# Altium PCB LimeFEA-mPCIe_1v0.PcbDoc (part 1 of 2)
Units mm, origin at the board's own origin, x right, y up, seen from the top; angles counter-clockwise.
Board outline 100 x 70 mm, 4 copper layers (Top Layer, Mid-Layer 1, Mid-Layer 2, Bottom Layer), stack 1.48 mm thick; 102 components, 83 nets, 520 pads, 498 vias.
Unrouted connection lines stored in the file: 11.
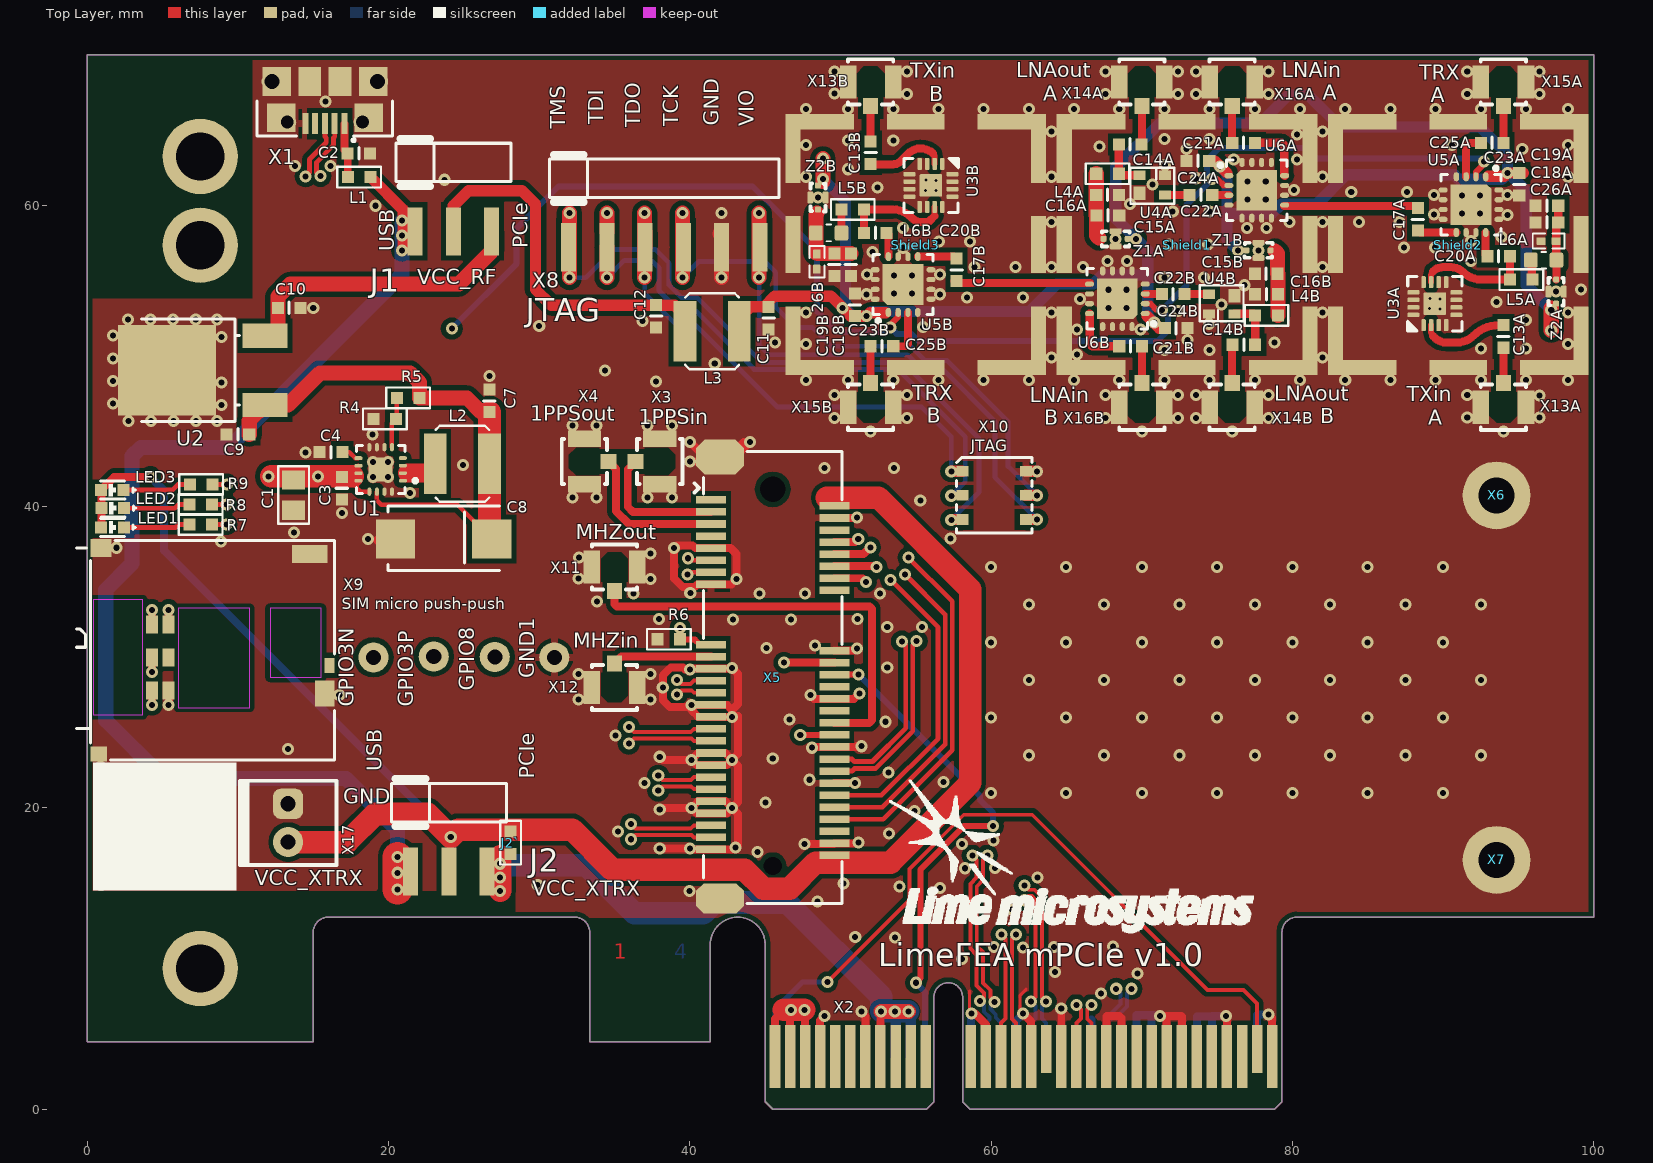
[diagram p0: Top Layer view]
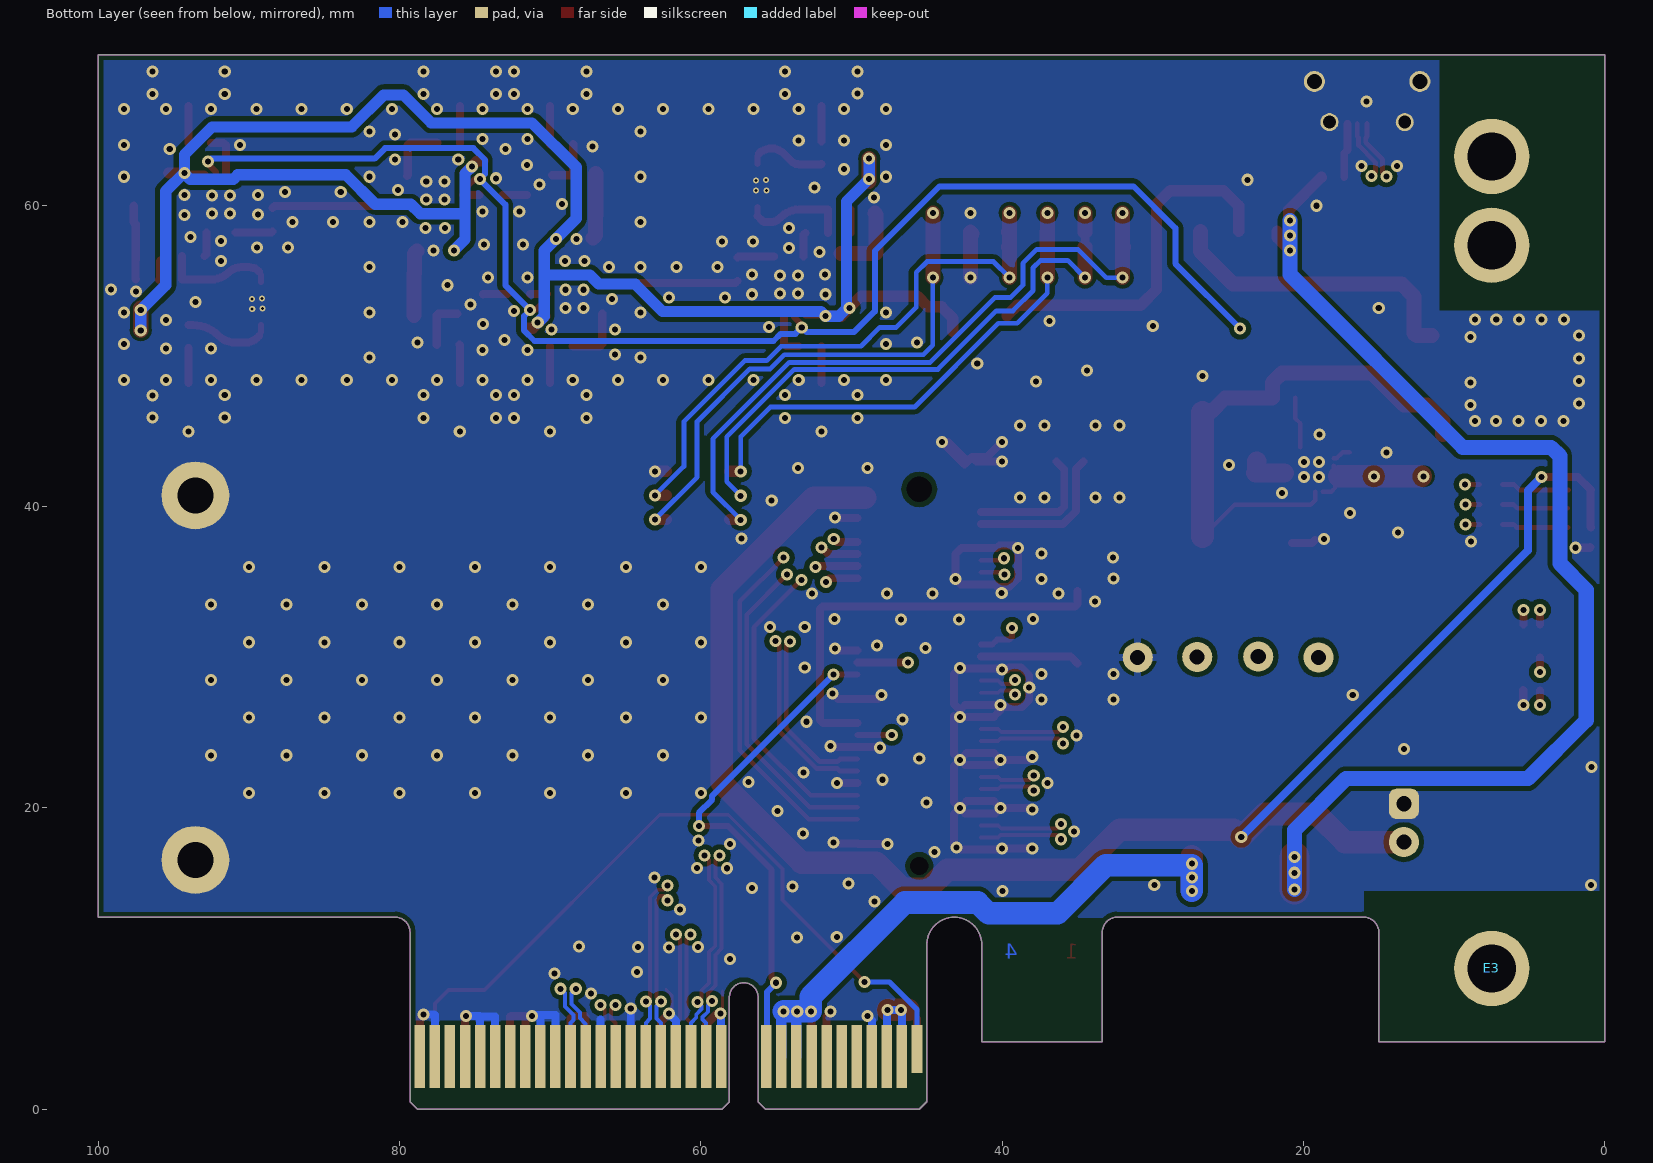
[diagram p1: Bottom Layer view, seen from below]
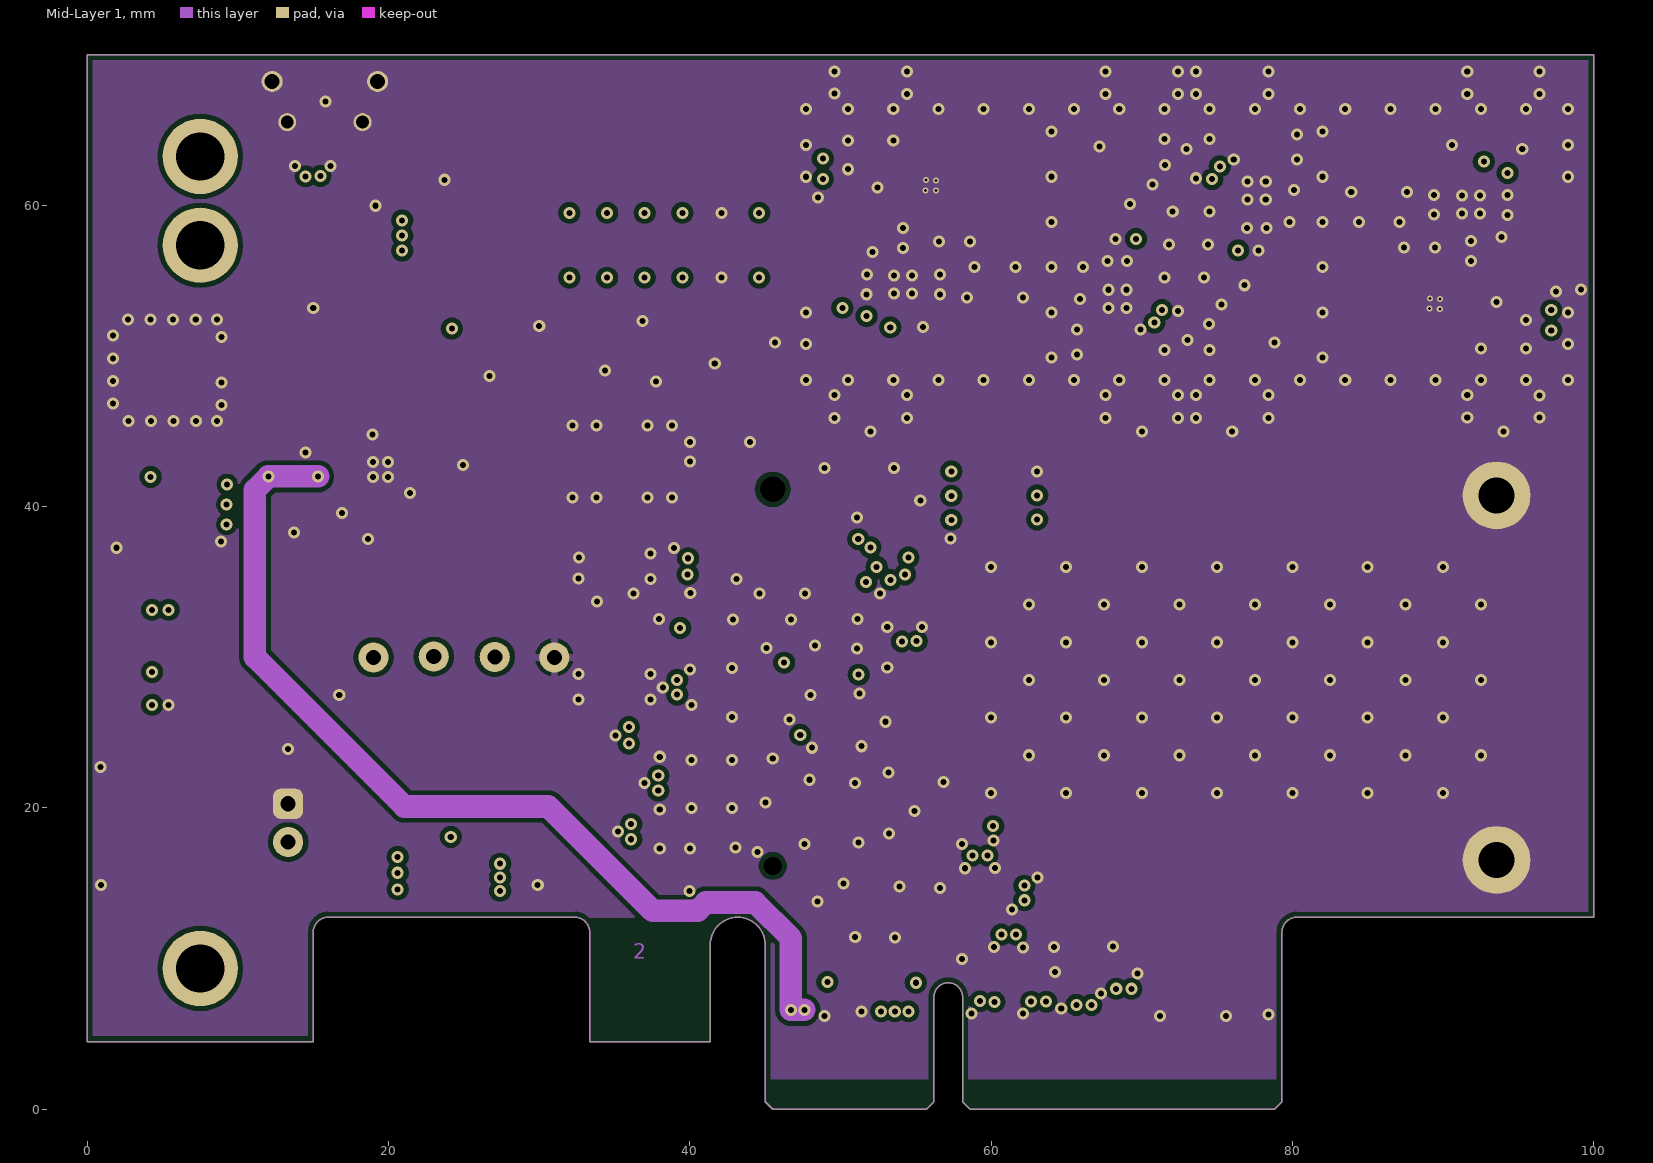
[diagram p2: Mid-Layer 1]
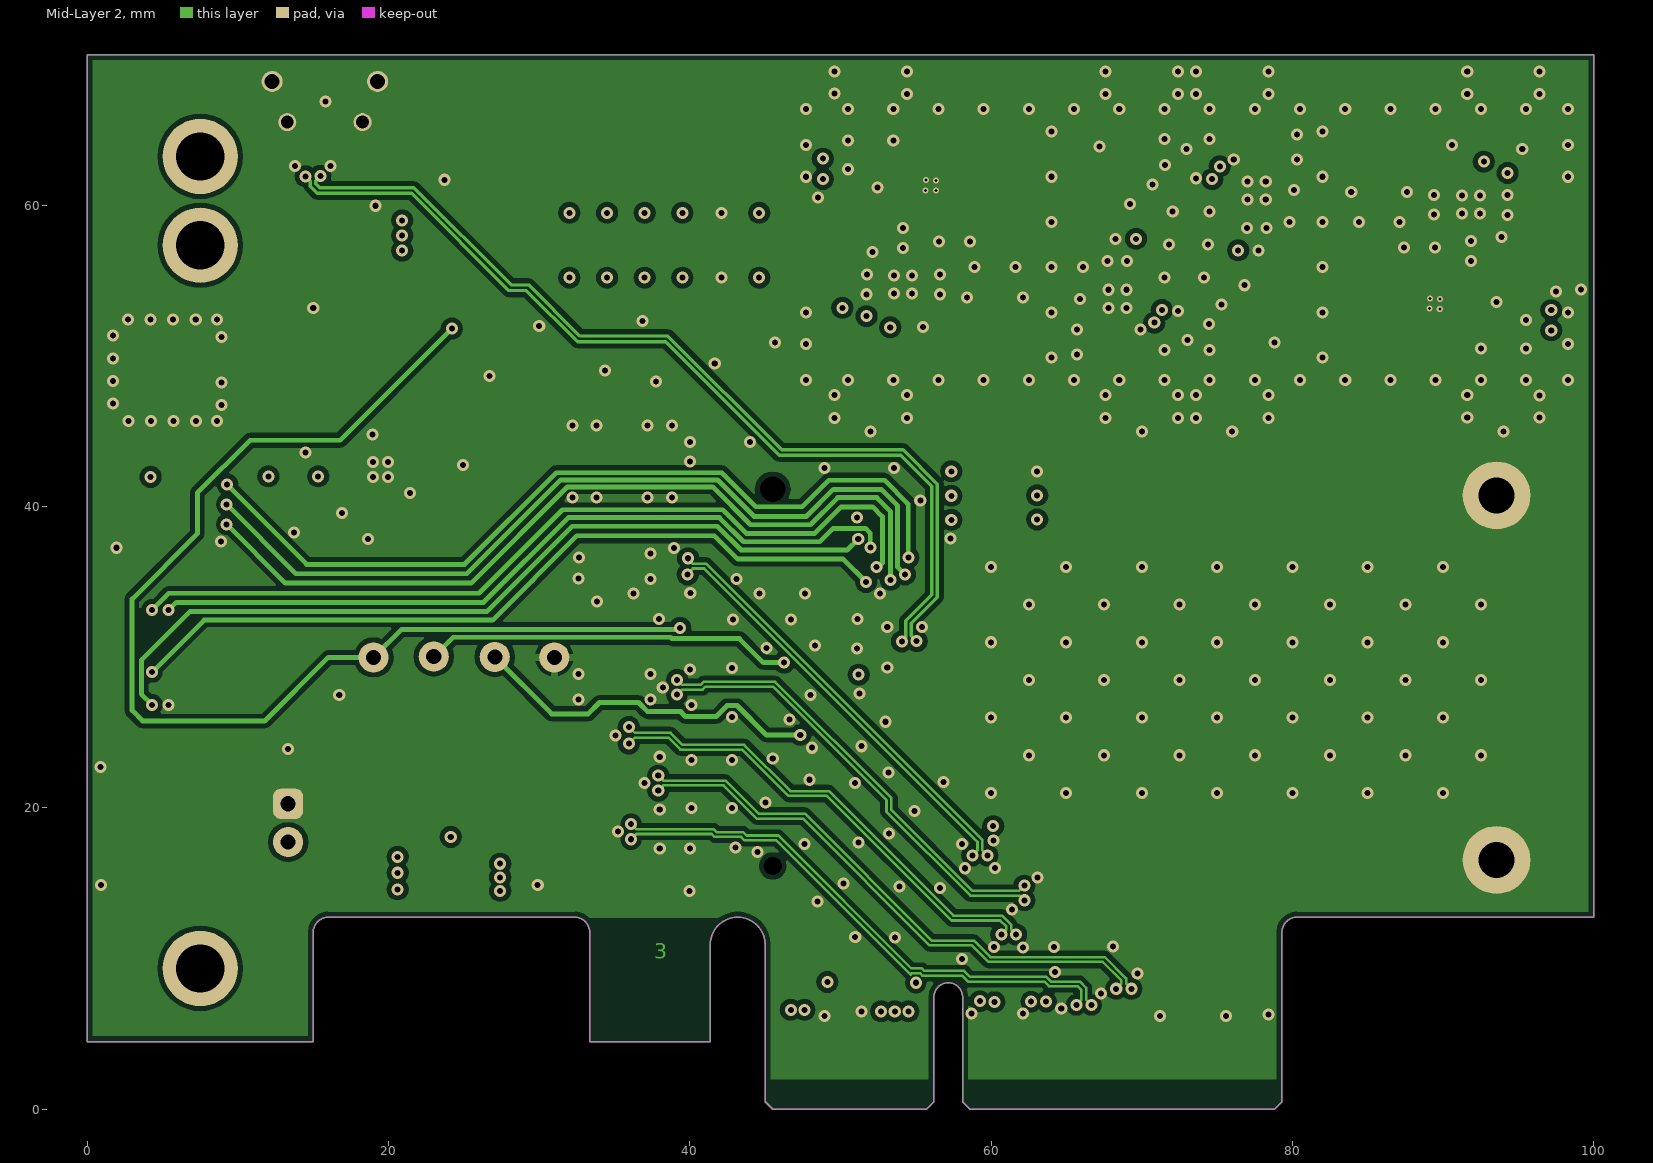
[diagram p3: Mid-Layer 2]

## Layer stack, top to bottom
Top Solder: solder mask 0.0102, Solder Resist, Dk 3.5
Top Layer: signal copper 0.035
Dielectric1: core 0.32, FR-4, Dk 4.2
Mid-Layer 1: signal copper 0.035
Dielectric2: prepreg 0.7, FR-4, Dk 4.2
Mid-Layer 2: signal copper 0.035
Dielectric3: core 0.32, FR-4, Dk 4.2
Bottom Layer: signal copper 0.035
Bottom Solder: solder mask 0.0102, Solder Resist, Dk 3.5

## Board outline
0,4.5 15,4.5 15,11.75 cw(c16,11.75) 16,12.75 32.35,12.75 cw(c32.35,11.75) 33.35,11.75 33.35,4.5 41.35,4.5 41.35,10.925 cw(c43.175,10.925) 45,10.925 45,0.5 45.5,0 55.7,0 56.2,0.5 56.2,7.45 cw(c57.15,7.45) 58.1,7.45 58.1,0.5 58.6,0 78.8,0 79.3,0.5 79.3,11.75 cw(c80.3,11.75) 80.3,12.75 100,12.75 100,70 0,70

## Design rules (kind name [scope] priority, off if disabled: settings)
Clearance Clearance_2 [All vs InPolygon] p1: gap=0.32 ignorepadtopadclearanceinfootprint=TRUE except(0: Arc-Hole Track-Hole SMDPad-Hole THPad-Hole Via-Hole Fill-Hole Poly-Hole Region-Hole Text-Hole)
Clearance Clearance_1 [All vs (OnLayer('Keep-Out Layer'))] p2: gap=0.15 ignorepadtopadclearanceinfootprint=TRUE except(0: Arc-Hole Track-Hole SMDPad-Hole THPad-Hole Via-Hole Fill-Hole Poly-Hole Region-Hole Text-Hole)
Clearance [All] p3: gap=0.15 ignorepadtopadclearanceinfootprint=TRUE
ComponentClearance [All] p1 off: gap=0.254 collisioncheckmode=3 verticalgap=0.254 showdistances=FALSE
DiffPairsRouting DiffPairsRouting_90 [InDifferentialPair('USB_D')] p1: maxlimit=0.15 minlimit=0.15 mostfreqgap=0.15 toplayer_minwidth=0.32 toplayer_maxwidth=0.32 toplayer_prefwidth=0.32 midlayer1_minwidth=0.22 midlayer1_maxwidth=0.22 midlayer1_prefwidth=0.22 midlayer2_minwidth=0.22 midlayer2_maxwidth=0.22 midlayer2_prefwidth=0.22 bottomlayer_minwidth=0.32 bottomlayer_maxwidth=0.32 bottomlayer_prefwidth=0.32 maxuncoupledlength=12.7
DiffPairsRouting DiffPairsRouting_100 [All] p2: maxlimit=0.165 minlimit=0.15 mostfreqgap=0.165 toplayer_mingap=0.165 toplayer_minwidth=0.26 toplayer_maxwidth=0.26 toplayer_prefwidth=0.26 midlayer1_maxgap=0.15 midlayer1_prefgap=0.15 midlayer1_minwidth=0.17 midlayer1_maxwidth=0.17 midlayer1_prefwidth=0.17 midlayer2_maxgap=0.15 midlayer2_prefgap=0.15 midlayer2_minwidth=0.17 midlayer2_maxwidth=0.17 midlayer2_prefwidth=0.17 bottomlayer_mingap=0.165 bottomlayer_minwidth=0.26 bottomlayer_maxwidth=0.26 bottomlayer_prefwidth=0.26 maxuncoupledlength=12.7
Height [All] p1 off: minheight=0 maxheight=25.4 prefheight=12.7
HoleSize [All] p1: absolutevalues=TRUE maxlimit=4 minlimit=0.2 maxpercent=80.000 minpercent=20.000
HoleToHoleClearance [All] p1: gap=0.4 allowstackedmicrovias=TRUE
MinimumSolderMaskSliver [All] p1: minsoldermaskwidth=0.05
NetAntennae [All] p1 off: netantennaetolerance=0
PolygonConnect PolygonConnect_2 [InNet('GND') vs HasPad('X5-0')] p1: connectstyle=Direct reliefconductorwidth=0.5 reliefentries=4 polygonreliefangle="90 Angle" airgapwidth=0.254
PolygonConnect PolygonConnect_1 [InNet('GND') vs HasFootprint('PCIe MiniCard 1.55mm conn', 'PCIE X4 EDGE CONNECTOR', 'Spring Probe Contact', 'WF-6R', 'Spring Contact 120220-0311', 'SIM-HOLDER', 'KP-C_d1mm','Molex 78864-1001') OR HasPad('X1-5','X8-2')] p2: connectstyle=Relief reliefconductorwidth=0.5 reliefentries=4 polygonreliefangle="90 Angle" airgapwidth=0.254
PolygonConnect [All] p3: connectstyle=Direct reliefconductorwidth=0.254 reliefentries=4 polygonreliefangle="90 Angle" airgapwidth=0.254
RoutingVias [All] p1: holewidth=0.4 width=0.8 viastyle="Through Hole" minholewidth=0.3 minwidth=0.7 maxholewidth=0.8 maxwidth=1
SilkToSilkClearance [All] p1: silktosilkclearance=0
SilkToSolderMaskClearance [IsPad] p1: minsilkscreentomaskgap=0 clearancetoexposedcopper=TRUE
SolderMaskExpansion [All] p1: expansion=0.102
Width [All] p1: maxlimit=2 minlimit=0.2 preferedwidth=0.53 midlayer1_prefwidth=0.33 midlayer2_prefwidth=0.33 minimp=50.000000 maximp=50.000000 favimp=50.000000
21 further rules are at their usual default settings.

## Classes and differential pairs
net class USB: USB_D_N USB_D_P
net class PCIe: NetU1_A10 NetU1_B10 PCI_REF_CLK_N PCI_REF_CLK_P PCI_RX0_N PCI_RX0_P PCI_RX1_N PCI_RX1_P PCI_TX0_N PCI_TX0_P PCI_TX1_N PCI_TX1_P
component class 04_Misc: C1 C2 C3 C4 C7 C8 C9 C10 C11 C12 C13 C15 C16 C17 E3 GND1 GPIO3N GPIO3P GPIO8 J1 J2 J2` L1 L2 L3 LED1 LED2 LED3 R4 R5 R6 R7 R7' R8 R9 Shield1 Shield2 Shield3 U1 U2 U3 X1 X2 X3 X4 X5 X6 X7 X8 X9 X10 X11 X12 X13 X15 X17 X100 X110
component class 05_RFFE: 26B C13A C13B C14A C14B C15A C15B C16A C16B C17A C17B C18A C18B C19A C19B C20A C20B C21A C21B C22A C22B C23A C23B C24A C24B C25A C25B C26A L3A L4A L4B L5A L5B L6A L6B U3A U3B U4A U4B U5A U5B U6A U6B X13A X13B X14A X14B X15A X15B X16A X16B Z1A Z1B Z2A Z2B
differential pair USB_D: +USB_D_P -USB_D_N
differential pair PCI_TX1: +PCI_TX1_P -PCI_TX1_N
differential pair PCI_TX0: +PCI_TX0_P -PCI_TX0_N
differential pair PCI_RX1: +PCI_RX1_P -PCI_RX1_N
differential pair PCI_RX0: +PCI_RX0_P -PCI_RX0_N
differential pair PCI_REF_CLK: +PCI_REF_CLK_P -PCI_REF_CLK_N

## Components (designator, comment, footprint, x,y, rotation, side; value= is the part's Value field where it differs from the comment)
26B "1uF, 10V" CAP0402 48.431,56.265 r90 top
C1 "10uF" C0805 13.7,40.776 r270 top
C2 "0.1uF" C0603-PHILLIPS 18.025,63.45 r0 top
C3 "0.1uF" C0603-PHILLIPS 16.9,41.225 r90 top
C4 "0.01uF" C0603-PHILLIPS 16.177,43.625 r180 top
C7 "22uF/6.3V" C0603-Phillips 26.7,47.025 r270 top
C8 "330uF/10V" cd7343 23.65,37.85 r0 top
C9 "0.1uF" C0603-PHILLIPS 10,44.8 r0 top
C10 "0.1uF" C0603-PHILLIPS 13.404,53.2 r180 top
C11 "10uF/6.3V" C0603-Phillips 45.222,52.513 r90 top
C12 "0.1uF" C0603-PHILLIPS 37.75,52.65 r90 top
C13A "100pF" C0603-PHILLIPS 94,51.3 r90 top
C13B "100pF" C0603-PHILLIPS 52,63.5 r270 top
C14A "100pF" C0603-PHILLIPS 69.225,64.05 r180 top
C14B "100pF" C0603-PHILLIPS 76.775,50.75 r0 top
C15A "0.1uF" C0603-PHILLIPS 67.75,59.337 r0 top
C15B "0.1uF" C0603-PHILLIPS 78.25,55.463 r180 top
C16A "100pF" C0603-PHILLIPS 67.725,60.7 r0 top
C16B "100pF" C0603-PHILLIPS 78.275,54.1 r180 top
C17A "100pF" C0603-PHILLIPS 88.325,59.075 r270 top
C17B "100pF" C0603-PHILLIPS 57.7,55.725 r90 top
C18A "0.1uF" C0603-PHILLIPS 96.889,58.877 r180 top
C18B "0.1uF" C0603-PHILLIPS 50.68,56.065 r270 top
C19A "100pF" C0603-PHILLIPS 96.889,59.977 r180 top
C19B "100pF" C0603-PHILLIPS 49.6,56.065 r270 top
C20A "100pF" C0603-PHILLIPS 93.688,56.625 r180 top
C20B "100pF" C0603-PHILLIPS 52.312,58.175 r0 top
C21A "100pF" C0603-PHILLIPS 76.75,64.15 r180 top
C21B "100pF" C0603-PHILLIPS 69.25,50.65 r0 top
C22A "100pF" C0603-PHILLIPS 73.925,60.696 r0 top
C22B "100pF" C0603-PHILLIPS 72.075,54.104 r180 top
C23A "10nF" C0603-PHILLIPS 95.05,61.4 r270 top
C23B "10nF" C0603-PHILLIPS 50.95,53.4 r90 top
C24A "10nF" C0603-PHILLIPS 73.725,62.95 r180 top
C24B "10nF" C0603-PHILLIPS 72.275,51.85 r0 top
C25A "100pF" C0603-PHILLIPS 93.25,64.15 r0 top
C25B "100pF" C0603-PHILLIPS 52.75,50.65 r180 top
C26A "1uF, 10V" CAP0402 97,57.625 r0 top
E3 "Custom PCIe Bracket XTRX" Custom_PCIe_bracket_XTRX1 7.5,9.35 r180 bottom locked value=FRW-002_PCIE_BRACKET_R5
GND1 "=Name" KP-C_d1mm#1 31,30 r0 top
GPIO3N "=Name" KP-C_d1mm#2 18.625,30 r180 top
GPIO3P "=Name" KP-C_d1mm#3 23,29.975 r180 top
GPIO8 "=Name" KP-C_d1mm#4 27,29.95 r180 top
J1 "TSM-103-01-T-SH" HEAD_MALE_3P_R/A_SMD 24.3,58.275 r0 top value="FE Power Select"
J2 "TSM-103-01-T-SH" Head_Male_3P_R/A_SMD 21.46,15.784 r0 top value="XTRX Power Select"
J2` "0" R0603-PHILLIPS 28.1,17.7 r90 top
L1 "BLM18PG181SN1D" TI160808-Phillips 18.05,61.875 r0 top
L2 "2.2uH" L-NRS5030 24.9,42.85 r90 top
L3 "15uH" L-NRS5030 41.475,51.65 r90 top
L4A "22nH" TF160808-Phillips 67.725,62.1 r0 top
L4B "22nH" TF160808-Phillips 78.275,52.7 r180 top
L5A "22nH" TF160808-Phillips 95.188,55.075 r180 top
L5B "22nH" TF160808-Phillips 50.812,59.725 r0 top
L6A "220nH, 2%" RES0603 96.672,56.363 r180 top
L6B "220nH, 2%" RES0603 49.212,58.175 r0 top
LED1 "LTST-C190KGKT" LED-0603GR 1.675,38.625 r180 top value=GREEN
LED2 "LTST-C190KGKT" LED-0603GR 1.7,39.9 r180 top value=GREEN
LED3 "LTST-C190KRKT" LED-0603RD 1.662,41.1 r180 top value=RED
R4 "2k" R0603-PHILLIPS 19.75,45.825 r180 top
R5 "12k" R0603-PHILLIPS 21.296,47.225 r0 top
R6 "1k" R0603-PHILLIPS 38.6,31.2 r0 top
R7 "330" R0603-PHILLIPS 7.525,38.824 r180 top
R8 "330" R0603-PHILLIPS 7.525,40.139 r180 top
R9 "330" R0603-PHILLIPS 7.555,41.475 r180 top
Shield1 "Screening shield frame BMI-S-202-F" BMI-S-202-F 64.35,48.75 r0 top locked
Shield2 "Screening shield frame BMI-S-202-F" BMI-S-202-F 82.35,48.75 r0 top locked
Shield3 "Screening shield frame BMI-S-202-F" BMI-S-202-F 46.35,48.75 r0 top locked
U1 "TPS62130RG" QFN16(3x3/0/5mm)-Case485AE 19.475,42.475 r180 top
U2 "NCP5501DT50G" DPAK-3 11.8,49.05 r90 top
U3A "TQP3M9018" TQP3M9018_PA_QFN16 89.45,53.475 r90 top
U3B "TQP3M9018" TQP3M9018_PA_QFN16 56,61.325 r270 top
U4A "SPF-5043Z" SOT-343[2X1.25] 70.7,61.35 r270 top
U4B "SPF-5043Z" SOT-343[2X1.25] 75.3,53.45 r90 top
U5A "SKY13286-359LF" "QFN16(4x4/0.65mm) SQ" 91.85,60.05 r270 top
U5B "SKY13286-359LF" "QFN16(4x4/0.65mm) SQ" 54.15,54.75 r90 top
U6A "SKY13286-359LF" "QFN16(4x4/0.65mm) SQ" 77.625,61 r0 top
U6B "SKY13286-359LF" "QFN16(4x4/0.65mm) SQ" 68.375,53.8 r180 top
X1 "105017-0001" USB-micro-B 15.775,69.675 r180 top
X2 "Mini PCI Express Card Edge connector" "PCIE X4 EDGE CONNECTOR" 45,0 r0 top locked
X3 "0734120110" U_FL 38,43 r0 top
X4 "0734120110" U_FL 33,43 r180 top
X5 "PCIe MiniCard 1.55mm connector" "PCIE MINICARD 1.55MM CONN" 45.5,41.15 r270 top locked
X6 "NT1R3000" "PCIe MiniCard 1.55mm stand off nut" 93.55,40.75 r0 top locked
X7 "NT1R3000" "PCIe MiniCard 1.55mm stand off nut" 93.55,16.55 r0 top locked
X8 "TSM-106-01-T-SH" HEAD_MALE_6P_R/A_SMD 38.3,57.225 r0 top value=JTAG
X9 "SIM micro push-push" SIM_SF56S006V4BR2000-dig 8.3,30.47 r0 top locked value=SF56S006V4BR2000
X10 "JTAG" "Molex 78864-1001" 60.2,40.75 r90 top locked
X11 "0734120110" U_FL 35,36 r90 top
X12 "0734120110" U_FL 35,28 r270 top
X13A "0734120110" U_FL 94,46.6 r270 top
X13B "0734120110" U_FL 52,68.2 r90 top
X14A "0734120110" U_FL 70,68.2 r90 top
X14B "0734120110" U_FL 76,46.6 r270 top
X15A "0734120110" U_FL 94,68.2 r90 top
X15B "0734120110" U_FL 52,46.6 r270 top
X16A "0734120110" U_FL 76,68.2 r90 top
X16B "0734120110" U_FL 70,46.6 r270 top
X17 "Header 2X1" Header1x2_TH_LOCKING 13.335,19.008 r90 top
Z1A "KNH16C105DB5TS" "KNH16 - DB Serie" 68.263,57.781 r180 top value=1uF/10V/2A
Z1B "KNH16C105DB5TS" "KNH16 - DB Serie" 77.737,57.019 r0 top value=1uF/10V/2A
Z2A "KNH16C105DB5TS" "KNH16 - DB Serie" 97.5,54.275 r90 top value=1uF/10V/2A
Z2B "KNH16C105DB5TS" "KNH16 - DB Serie" 48.5,60.525 r270 top value=1uF/10V/2A

## Footprints (in the part's own frame and the unit in brackets; to place one, negate y for a bottom-side part, rotate by r counter-clockwise, add the part's x,y. Pads: shape width x height; smd on the part's side, far side on the other; paste and mask are expansions set on the pad)
BMI-S-202-F [mm] "Screening Shield Frame 16.5x16.5x3.6mm"
  rect 1x4.55 smd paste-2: 0(0.5,2.275) 0(0.5,15.025) 0(16.8,2.275) 0(16.8,15.025)
  rect 1x3.8 smd: 0(0.5,8.65) 0(16.8,8.65)
  rect 4.55x1 smd: 0(2.275,0.5) 0(2.275,16.8) 0(15.025,0.5) 0(15.025,16.8)
  rect 3.8x1 smd: 0(8.65,0.5) 0(8.65,16.8)
  body extent 0.4,0.4 16.9,16.9, height 3.6
C0603-PHILLIPS [mm]
  rect 0.8x0.8 smd: 1(-0.75,0) 2(0.75,0)
  silkscreen extent 0,-0.38 0,0.38, body extent -0.8,-0.4 0.8,0.4, height 0.3
C0603-Phillips [mm]
  rect 0.8x0.8 smd: 1(-0.75,0) 2(0.75,0)
  silkscreen extent 0,-0.38 0,0.38, body extent -0.8,-0.4 0.8,0.4, height 0.3
C0805 [mil]
  rect 50x60 smd: 1(-39.37,0) 2(40,0)
  silkscreen extent -75,-40 75,40, body extent -39,-24 40,25, height 31
CAP0402 [mm] "Chip Capacitor, Body 1.0x0.5mm, 0402, IPC Medium Density"
  round 0.2 on Mech15: 0(0,0)
  rrect20% 0.6x0.5 smd: 1(-0.5,0) 2(0.5,0)
  Top Layer pour cut-out: -0.2,0.35 0.2,0.35 0.2,-0.35 -0.2,-0.35
  silkscreen extent -1.05,-0.5 1.05,0.5, body extent -0.52,-0.27 0.53,0.28, height 0.55
cd7343 [mm]
  rect 2.6x2.6 smd: 1(3.2,0) 2(-3.2,0)
  silkscreen extent -3.7,-2.1 3.7,2.2, body extent -3.51,-2.04 3.5,2.03, height 3.1
Custom_PCIe_bracket_XTRX1 [mil] "3D STEP model of XTRX Custom-made PCIe bracket v1"
  round 60 smd paste-78.74: 0(0,0)
  body extent -125,-964 820,3794, height 175
DPAK-3 [mm] "TO-252"
  rect 1.6x3 smd: 1(-2.3,0) 3(2.3,0)
  rect 6x6.5 smd: 2(0,6.5)
  silkscreen extent -3.4,1.7 3.4,8.2, body extent -3.3,-0.9 3.3,9.2, height 2.4
HEAD_MALE_3P_R/A_SMD [mm] "Samtec Header Male 3p 2.54mm Right Angle SMD"
  rect 1x3.2 smd: 1(-2.54,0) 2(0,0) 3(2.54,0)
  silkscreen extent -3.82,3 3.84,6.15, body extent -3.81,-1.5 3.81,11.69, height 3.05
Head_Male_3P_R/A_SMD [mm] "Samtec Header Male 3p 2.54mm Right Angle SMD"
  rect 1x3.2 smd: 1(0,0) 2(2.54,0) 3(5.08,0)
  silkscreen extent -1.28,3 6.38,6.15, body extent -1.27,-1.5 6.35,11.69, height 3.05
HEAD_MALE_6P_R/A_SMD [mm] "Samtec Header Male 6p 2.54mm Right Angle SMD"
  rect 1x3.2 smd: 1(-6.35,0) 2(-3.81,0) 3(-1.27,0) 4(1.27,0) 5(3.81,0) 6(6.35,0)
  silkscreen extent -7.63,3 7.63,6.15, body extent -7.62,-1.5 7.62,11.69, height 3.05
Header1x2_TH_LOCKING [mm]
  rrect50% 2x2 hole 1: 1(1.271,0)
  round 2 hole 1: 2(-1.271,0)
  silkscreen extent -2.8,-3.2 2.8,3.2, body extent -2.54,-2.9 2.54,2.9, height 11.52
"KNH16 - DB Serie" [mm] "EMI Filter"
  rrect50% 0.4x0.4 smd mask+0.05: 1(-0.8,0) 3(0.8,0)
  rrect50% 0.8x0.4 smd mask+0.05: 2(0,0.5) 2(0,-0.5)
  silkscreen extent -0.92,-0.5 0.92,0.5, body extent -0.79,-0.4 0.79,0.4, height 0.6
KP-C_d1mm#1 [mm]
  round 2 hole 1: 1(0,0)
KP-C_d1mm#2 [mm]
  round 2 hole 1: 1(-0.375,0)
KP-C_d1mm#3 [mm]
  round 2 hole 1: 1(0,-0.075)
KP-C_d1mm#4 [mm]
  round 2 hole 1: 1(-0.05,-0.075)
L-NRS5030 [mm] "Inductor Taiyo Yuden 5x5mm"
  rect 4x1.5 smd: 1(0,1.8) 2(0,-1.8)
  silkscreen extent -2.52,-1.79 2.52,1.79, body extent -2.45,-2.45 2.45,2.45, height 3
LED-0603GR [mm] "LED GREEN 0603"
  rect 0.8x0.8 smd: 1(-0.75,0) 2(0.75,0)
  silkscreen extent -1.53,-0.6 0.8,0.6, body extent -1.09,-0.4 0.92,0.4, height 0.8
LED-0603RD [mm] "LED RED 0603"
  rect 0.8x0.8 smd: 1(-0.75,0) 2(0.75,0)
  silkscreen extent -1.53,-0.6 0.8,0.6, body extent -1.09,-0.4 0.92,0.4, height 0.8
"Molex 78864-1001" [mm] "Spring connector, gap=1.2~1.6mm, pitch=1.6mm, 6pos"
  rect 0.7x0.8 smd: 1(1.6,2.1) 2(0,2.1) 3(-1.6,2.1) 4(-1.6,-2.1) 5(0,-2.1) 6(1.6,-2.1)
  silkscreen extent -2.5,-2.5 2.5,2.5, body extent -2.4,-2.5 2.4,2.5, height 2
"PCIE MINICARD 1.55MM CONN" [mm] "PCIe MiniCard connector full size with mounting nuts"
  oct 2.3x3.2 smd: 0(-2.15,-3.5)
  oct 2x3.2 smd: 0(27.15,-3.5)
  rect 0.5x2 smd mask+0.05: 1(0.7,-4.1) 2(1.1,4.1) 3(1.5,-4.1) 4(1.9,4.1) 5(2.3,-4.1) 6(2.7,4.1) 7(3.1,-4.1) 8(3.5,4.1) 9(3.9,-4.1) 10(4.3,4.1) 11(4.7,-4.1) 12(5.1,4.1) 13(5.5,-4.1) 14(5.9,4.1) 15(6.3,-4.1) 16(6.7,4.1) 17(10.3,-4.1) 18(10.7,4.1) 19(11.1,-4.1) 20(11.5,4.1) 21(11.9,-4.1) 22(12.3,4.1) 23(12.7,-4.1) 24(13.1,4.1) 25(13.5,-4.1) 26(13.9,4.1) 27(14.3,-4.1) 28(14.7,4.1) 29(15.1,-4.1) 30(15.5,4.1) 31(15.9,-4.1) 32(16.3,4.1) 33(16.7,-4.1) 34(17.1,4.1) 35(17.5,-4.1) 36(17.9,4.1) 37(18.3,-4.1) 38(18.7,4.1) 39(19.1,-4.1) 40(19.5,4.1) 41(19.9,-4.1) 42(20.3,4.1) 43(20.7,-4.1) 44(21.1,4.1) 45(21.5,-4.1) 46(21.9,4.1) 47(22.3,-4.1) 48(22.7,4.1) 49(23.1,-4.1) 50(23.5,4.1) 51(23.9,-4.1) 52(24.3,4.1)
  round 0 hole 1.7 unplated: MH0(0,0)
  round 0 hole 1.2 unplated: MH0(25,0)
  silkscreen extent -2.5,-5.2 27.5,4.6, body extent -2.45,-4.55 27.45,4.54, height 4
"PCIe MiniCard 1.55mm stand off nut" [mm] "PCIe MiniCard connector mounting stand off nut"
  round 4.5 hole 2.4: 0(0,0)
  body extent -2,-2 2,2, height 1.55
"PCIE X4 EDGE CONNECTOR" [mm] "Golden finger, PCIe x4, Dual, Staggered, Pitch 1mm, 2x32-Position"
  rect 0.7x3.2 smd far side paste-5: A1(0.65,4)
  rect 0.7x4.2 smd far side paste-5: A2(1.65,3.5) A3(2.65,3.5) A4(3.65,3.5) A5(4.65,3.5) A6(5.65,3.5) A7(6.65,3.5) A8(7.65,3.5) A9(8.65,3.5) A10(9.65,3.5) A11(10.65,3.5) A12(13.65,3.5) A13(14.65,3.5) A14(15.65,3.5) A15(16.65,3.5) A16(17.65,3.5) A17(18.65,3.5) A18(19.65,3.5) A19(20.65,3.5) A20(21.65,3.5) A21(22.65,3.5) A22(23.65,3.5) A23(24.65,3.5) A24(25.65,3.5) A25(26.65,3.5) A26(27.65,3.5) A27(28.65,3.5) A28(29.65,3.5) A29(30.65,3.5) A30(31.65,3.5) A31(32.65,3.5) A32(33.65,3.5)
  rect 0.7x4.2 smd paste-5: B1(0.65,3.5) B2(1.65,3.5) B3(2.65,3.5) B4(3.65,3.5) B5(4.65,3.5) B6(5.65,3.5) B7(6.65,3.5) B8(7.65,3.5) B9(8.65,3.5) B10(9.65,3.5) B11(10.65,3.5) B12(13.65,3.5) B13(14.65,3.5) B14(15.65,3.5) B15(16.65,3.5) B16(17.65,3.5) B18(19.65,3.5) B19(20.65,3.5) B20(21.65,3.5) B21(22.65,3.5) B22(23.65,3.5) B23(24.65,3.5) B24(25.65,3.5) B25(26.65,3.5) B26(27.65,3.5) B27(28.65,3.5) B28(29.65,3.5) B29(30.65,3.5) B30(31.65,3.5) B32(33.65,3.5)
  rect 0.7x3.2 smd paste-5: B17(18.65,4) B31(32.65,4)
  round 5 hole 3.2 paste-5: MH1(-37.5,9.35) MH48(-37.5,57.35) MH53(-37.5,63.25)
QFN16(3x3/0/5mm)-Case485AE [mm] "NLAS3899"
  rect 1.6x1.6 smd paste-1: 0(0,0)
  oval 0.55x0.25 smd mask+0.075: 1(-1.475,0.75) 2(-1.475,0.25) 3(-1.475,-0.25) 4(-1.475,-0.75) 9(1.475,-0.75) 10(1.475,-0.25) 11(1.475,0.25) 12(1.475,0.75)
  oval 0.25x0.55 smd mask+0.075: 5(-0.75,-1.475) 6(-0.25,-1.475) 7(0.25,-1.475) 8(0.75,-1.475) 13(0.75,1.475) 14(0.25,1.475) 15(-0.25,1.475) 16(-0.75,1.475)
  silkscreen extent -2.43,-1.6 1.6,1.6, body extent -1.5,-1.5 1.5,1.5, height 1
"QFN16(4x4/0.65mm) SQ" [mm] "QFN, 16-Leads, Body 4,0x4,0mm (SQ), Pitch 0,65mm, IPC High Density"
  oct 1.15x1.15 smd paste+0 mask+0: 0(-0.775,0.775)
  rect 2.7x2 smd paste+0 mask+0: 0(0,-0.35)
  rect 2x2.7 smd paste+0 mask+0: 0(0.35,0)
  oval 0.6x0.35 smd: 1(-1.85,0.975) 2(-1.85,0.325) 3(-1.85,-0.325) 4(-1.85,-0.975) 9(1.85,-0.975) 10(1.85,-0.325) 11(1.85,0.325) 12(1.85,0.975)
  oval 0.35x0.6 smd: 5(-0.975,-1.85) 6(-0.325,-1.85) 7(0.325,-1.85) 8(0.975,-1.85) 13(0.975,1.85) 14(0.325,1.85) 15(-0.325,1.85) 16(-0.975,1.85)
  silkscreen extent -2.54,-2 2,2, body extent -2,-2 2,2, height 0.86
R0603-PHILLIPS [mm]
  rect 0.8x0.8 smd: 1(-0.75,0) 2(0.75,0)
  silkscreen extent -1.45,-0.69 1.45,0.69, body extent -0.8,-0.4 0.8,0.4, height 0.3
RES0603 [mm] "Chip Resistor, Body 1.6x0.8mm, 0603, IPC Medium Density"
  round 0.254 on Mech15: 0(0,0)
  rrect25% 0.9x1 smd: 1(-0.85,0) 2(0.85,0)
  Top Layer pour cut-out: -0.4,0.6 0.4,0.6 0.4,-0.6 -0.4,-0.6
  silkscreen extent -0.15,-0.56 0.15,0.56, body extent -0.87,-0.47 0.88,0.48, height 0.54
SIM_SF56S006V4BR2000-dig [mm] "JAE push-push, micro SIM card holder"
  rect 1.1x1 smd: 0(-7.55,-6.9)
  rect 1.4x1.2 smd: 0(-7.4,6.8)
  rect 2.35x1.2 smd: 0(6.475,6.4)
  rect 1.3x1.75 smd: 0(7.45,-2.87)
  rect 0.8x1.2 smd: 1(-4,-2.66) 2(-4,-0.47) 3(-4,1.72) 5(-2.9,-2.66) 6(-2.9,-0.47) 7(-2.9,1.72)
  rect 0.65x1 smd: 8(7.775,-1)
  Top Layer keep-out region: -7.9,-4.275 -4.625,-4.275 -4.625,3.35 -7.9,3.35
  Top Layer keep-out region: -2.275,-3.8 2.475,-3.8 2.475,2.8 -2.275,2.8
  Top Layer keep-out region: 3.85,-1.8 7.225,-1.8 7.225,2.8 3.85,2.8
  silkscreen extent -9,-7.3 8.1,7.3, body extent -9.1,-7.2 8,7.2, height 1.22
SOT-343[2X1.25] [mm]
  rect 0.6x0.8 smd: 1(-0.65,-0.85) 3(0.65,0.85) 4(-0.65,0.85)
  rect 0.9x0.8 smd: 2(0.55,-0.85)
  silkscreen extent -1.15,-1.45 1.25,1.45, body extent -1,-1.08 1,1.02, height 0.9
TF160808-Phillips [mm]
  rect 0.8x0.8 smd: 1(-0.75,0) 2(0.75,0)
  silkscreen extent -1.45,-0.69 1.45,0.69, body extent -0.86,-0.45 0.85,0.45, height 0.9
TI160808-Phillips [mm]
  rect 0.8x0.8 smd: 1(-0.75,0) 2(0.75,0)
  silkscreen extent -1.45,-0.69 1.45,0.69, body extent -0.86,-0.45 0.85,0.45, height 0.9
TQP3M9018_PA_QFN16 [mm]
  rrect50% 0.8x0.3 smd mask+0.05: 1(-1.425,0.75) 2(-1.425,0.25) 3(-1.425,-0.25) 4(-1.425,-0.75) 9(1.425,-0.75) 10(1.425,-0.25) 11(1.425,0.25) 12(1.425,0.75)
  rrect50% 0.3x0.8 smd mask+0.05: 5(-0.75,-1.425) 6(-0.25,-1.425) 7(0.25,-1.425) 8(0.75,-1.425) 13(0.75,1.425) 14(0.25,1.425) 15(-0.25,1.425) 16(-0.75,1.425)
  rrect10% 1.5x1.5 smd mask+0.05: PAD(0,0)
  silkscreen extent -1.8,-1.8 1.8,1.83, body extent -1.5,-1.5 1.5,1.5, height 0.92
U_FL [mm] "Ultraminiature Coax Connector (UMCC)"
  rect 1.05x1 smd: 1(-1.6,0)
  rect 2.2x1.1 smd: 2(0,-1.5) 2(0,1.5)
  Top Layer pour cut-out: -1,0.925 0.55,0.925 1.025,0.45 1.025,-0.45 0.55,-0.925 -1,-0.925
  silkscreen extent -1.5,-1.5 1.5,1.5, body extent -1.55,-1.5 1.3,1.5, height 1.25
USB-micro-B [mm] "Molex 105017-0001"
  round 1.4 hole 1: 0(-3.5,1.45) 0(3.5,1.45)
  rect 1.9x1.9 smd: 0(-3.2,1.45) 0(-2.9,3.85) 0(2.9,3.85) 0(3.2,1.45)
  round 1.2 hole 0.85: 0(-2.5,4.15) 0(2.5,4.15)
  rect 1.5x1.9 smd: 0(-1,1.45) 0(1,1.45)
  rect 0.4x1.4 smd mask+0.074: 1(-1.3,4.25) 2(-0.65,4.25) 3(0,4.25) 4(0.65,4.25) 5(1.3,4.25)
  silkscreen extent -4.5,2.75 4.5,5.45, body extent -4.1,-1.13 4.1,4.3, height 2.7

## Part data
26B C26A: library part Cap_0402, "CAP CER 1UF 10V X5R 0402", Manufacturer=Yageo, Manufacturer Part Number 1=CC0402MRX5R6BB105, Operating Temperature="-55°C ~ 85°C", Package / Case="0402 (1005 Metric)", Ratings=-, Supplier Part Number 1=311-1732-1-ND, Temperature Coefficient=X5R, Tolerance=±20%, Voltage - Rated=10V, Applications="General Purpose", Category=Capacitors, ComponentLink1Description=http://www.yageo.com/documents/recent/UPY-GPHC_X5R_4V-to-50V_25.pdf, ComponentLink1URL=http://www.yageo.com/documents/recent/UPY-GPHC_X5R_4V-to-50V_25.pdf, Failure Rate=-, Features=-, Height - Seated (Max)=-, Lead Spacing=-, Lead Style=-, Mounting Type="Surface Mount, MLCC", Notification="Current market demand for these product types have resulted in fluctuating and extending lead times. Lead times may differ.", Packaging="Cut Tape (CT)", Part Description="1µF 10V Ceramic Capacitor X5R 0402 (1005 Metric) 0.039\" L x 0.020\" W (1.00mm x 0.50mm)", Part Status=Active, Pricing 1="1=0.22, 10=0.156, 100=0.0732, 500=0.0513, 1000=0.04248, 2500=0.03953, 5000=0.03617 (USD)", RoHS="RoHS Compliant", Size / Dimension="0.039\" L x 0.020\" W (1.00mm x 0.50mm)", Stock 1=69600, Supplier 1=Digi-Key, Thickness (Max)="0.022\" (0.55mm)"
C1: library part C0805, "Capacitor", Manufacturer=MURATA, Tolerance=20%, Link=https://octopart.com/search?start=0&sort=avg_price&sort-dir=asc&category_ids=6332&specs.capacitance.value=1e-05&specs.voltage_rating_dc.value=25&avg_avail=(1__*)&specs.case_package_si.value=2012, Name=SMD0805, U/P/TKE=X5R/16V
C2 C3 C4 C7 C9 C10 C11 C12 C13A C13B C14A C14B C15A C15B C16A C16B C17A C17B C18A C18B C19A C19B C20A C20B C21A C21B C22A C22B C23A C23B C24A C24B C25A C25B: library part C0603, "Capacitor", Manufacturer=MURATA, Tolerance=20%, Name=SMD0603
  C2 C3 C4 C9 C10 C12 C15A C15B C18A C18B C23A C23B C24A C24B: U/P/TKE=X7R
  C7: Link=https://octopart.com/grm188r60j226mea0d-murata-21407286, U/P/TKE=X5R/6.3V
  C11: Link=https://octopart.com/search?q=0603+10uF+6.3v, U/P/TKE=Y5V
  C13A C13B C14A C14B C16A C16B C17A C17B C19A C19B C20A C20B C21A C21B C22A C22B C25A C25B: U/P/TKE=NP0
C8: library part CD7343, "Capacitor", Manufacturer=Kemet, Link=https://octopart.com/search?q=330uF+10V+tantalum+D, Name=CASE-D, U/P/TKE=10V
E3: library part PCI_Bracket_XTRX1, "CNC'ed enclosure component", Link=https://drive.google.com/drive/u/0/folders/1H4kDKzo1hdiNwqkA16l54XGZ7OmraAuD, Name="Custom PCIe Bracket XTRX"
GND1 GPIO3N GPIO3P GPIO8: library part KP40X40, Manufacturer=PCB
J1 J2: library part "JUMPER_3P R/A SMD", "Jumper 3 pin", Manufacturer=Samtec, Link=https://octopart.com/tsm-103-01-t-sh-samtec-8024795?r=sp&s=QwI2rG3eQKmfzGqx_DrZCQ, Misc="SMT 3pin R/A jumper/connector", Name=TSM-103-01-T-SH
J2`: library part R0603, "Jumper", Manufacturer=YAGEO, Tolerance=1%, Name=SMD0603, U/P/TKE=0.1W
L1: library part EMI_BLM18, "Ferrite Bead EMIFIL", Manufacturer=MURATA, Link=https://octopart.com/blm18pg181sn1d-murata-755298?r=sp&s=UoqSqWT2SxaJq0Sn2mx1DQ, Name=BLM18PG181SN1D, U/P/TKE="180 Ohm, 90 mOhm,1.5A"
L2 L3: library part L-NRS50x0, "Coil", Manufacturer="Taiyo Yuden", Tolerance=20%, Link=https://octopart.com/nrs5020t150mmgj-taiyo+yuden-13146350
  L2: Name=NRS5020T2R2NMGJ, U/P/TKE=2.9A/42mOhm
  L3: Name=NRS5020T150MMGJ, U/P/TKE=1.1A/165mOhm
L4A L4B L5A L5B: library part TF160808, "Coil", Manufacturer=MuRata, Link=https://octopart.com/lqw18an22ng00d-murata-890271, Misc="Self Resonance >4GHz", Name=LQW18AN22NG00D
L6A L6B: library part Inductor, "Power Inductors - SMD .22 UH 20%", Manufacturer=TDK, Manufacturer Part Number 1=MLZ1608DR22DT000, Supplier Part Number 1=445-6387-1-ND, ComponentLink1Description=http://productfinder.pulseeng.com/products/datasheets/WC701.pdf, ComponentLink1URL=http://productfinder.pulseeng.com/products/datasheets/WC701.pdf, ComponentLink2Description=https://datasheet.ciiva.com/11799/0900766b80a002db-11799279.pdf?src-supplier=RSComponents, ComponentLink2URL=https://datasheet.ciiva.com/11799/0900766b80a002db-11799279.pdf?src-supplier=RSComponents, ComponentLink3Description=https://datasheet.ciiva.com/14124/qhlqw18a-data-e-14124619.pdf?src-supplier=Distrelec, ComponentLink3URL=https://datasheet.ciiva.com/14124/qhlqw18a-data-e-14124619.pdf?src-supplier=Distrelec, ComponentLink4Description=https://datasheet.ciiva.com/6705/l0075s0080lqw18a-00-6705627.pdf?src-supplier=Digi-Key, ComponentLink4URL=https://datasheet.ciiva.com/6705/l0075s0080lqw18a-00-6705627.pdf?src-supplier=Digi-Key, ComponentLink5Description=https://datasheet.ciiva.com/6705/l0075s0080lqw18a-00-6705626.pdf?src-supplier=Digi-Key, ComponentLink5URL=https://datasheet.ciiva.com/6705/l0075s0080lqw18a-00-6705626.pdf?src-supplier=Digi-Key, ComponentLink6Description=https://datasheet.ciiva.com/6705/l0075s0080lqw18a-00-6705631.pdf?src-supplier=Digi-Key, ComponentLink6URL=https://datasheet.ciiva.com/6705/l0075s0080lqw18a-00-6705631.pdf?src-supplier=Digi-Key, ComponentLink7Description=https://datasheet.ciiva.com/4977/product-4977173.pdf?src-supplier=Mouser, ComponentLink7URL=https://datasheet.ciiva.com/4977/product-4977173.pdf?src-supplier=Mouser, ComponentLink8Description=https://datasheet.ciiva.com/46391/1487239-46391853.pdf?src-supplier=Element14, ComponentLink8URL=https://datasheet.ciiva.com/46391/1487239-46391853.pdf?src-supplier=Element14, ComponentLink9Description=https://datasheet.ciiva.com/8507/l0075s0080lqw18a-00-8507496.pdf?src-supplier=Avnet, ComponentLink9URL=https://datasheet.ciiva.com/8507/l0075s0080lqw18a-00-8507496.pdf?src-supplier=Avnet, ComponentLink10Description=https://datasheet.ciiva.com/29698/inductor-commercial-decoupling-mlz-en-29698909.pdf?src-supplier=Digikey, ComponentLink10URL=https://datasheet.ciiva.com/29698/inductor-commercial-decoupling-mlz-en-29698909.pdf?src-supplier=Digikey, ComponentLink11Description=https://datasheet.ciiva.com/29698/inductor-commercial-decoupling-mlz-en-29698910.pdf?src-supplier=Digikey, ComponentLink11URL=https://datasheet.ciiva.com/29698/inductor-commercial-decoupling-mlz-en-29698910.pdf?src-supplier=Digikey, ComponentLink12Description=https://datasheet.ciiva.com/29698/inductor-commercial-decoupling-mlz-en-29698911.pdf?src-supplier=Digikey, ComponentLink12URL=https://datasheet.ciiva.com/29698/inductor-commercial-decoupling-mlz-en-29698911.pdf?src-supplier=Digikey, Part Description="Fixed Inductors 22 NH 2%", Pricing 1="1=0,12, 10=0,095, 25=0,0876, 50=0,0772, 100=0,0676, 250=0,06436, 500=0,06052, 1000=0,04635 (USD)", RoHS=Yes, Stock 1=11427, Supplier 1=Digikey
LED1 LED2: library part LED0603GR_Lite-On, "LED GREEN", Manufacturer="Lite-On Inc", Link=https://octopart.com/ltst-c190kgkt-lite-on-549897, Name=LTST-C190KGKT, U/P/TKE="40mcd, 2V/20mA, -30+85°C"
LED3: library part LED0603RD_Lite-On, "LED RED", Manufacturer="Lite-On Inc", Link=http://www.digikey.com/product-detail/en/LTST-C190KRKT/160-1436-1-ND/386816, Name=LTST-C190KRKT, U/P/TKE="100mcd, 2V/20mA, -30+85°C"
R4 R5 R6 R7 R8 R9: library part R0603, "Resistor", Manufacturer=YAGEO, Tolerance=1%, Name=SMD0603, U/P/TKE=0.1W
Shield1 Shield2 Shield3: library part "Screen frame BMI-S-202-F", "Screening shield frame", Manufacturer="Laird Tech", Link=https://octopart.com/bmi-s-202-f-laird-19008954, Name="Screening shield frame BMI-S-202-F"
U1: library part TPS6213x, "IC", Manufacturer=TI, Link=https://octopart.com/search?q=tps62130rg, Name=TPS62130RG, PDF=http://www.ti.com/lit/ds/symlink/tps62130.pdf, Swap=No, U/P/TKE=3-17V
U2: library part NCP5501DTxxG, "IC LDO fixed Vo", Manufacturer="ON Semi", Link=https://octopart.com/ncp5501dt50g-on+semiconductor-1008548?r=sp&s=uWahieJ2SIu9_CpFmEZfrA, Name=NCP5501DT50G, U/P/TKE=5.0V/0.5A/3%
U3A U3B: library part TQP3M9018_PA, "RF Amplifier .05-4GHz P1dB= 22dB Gain 26.4dB 5Volts", Manufacturer=Qorvo, Manufacturer Part Number 1=TQP3M9019, Supplier Part Number 1=772-TQP3M9019, Part Description="RF Amplifier .05-4GHz P1dB= 22dB Gain 26.4dB 5Volts", Pricing 1="1=7,48, 10=7,48, 50=5,43, 100=4,41, 1000=2,44, 10000=2,35 (USD)", RoHS=Yes, Stock 1=6804, Supplier 1=Mouser
  U3A: Decription="RF Amplifier .05-4GHz P1dB= 22dB Gain 26.4dB 5Volts"
U4A U4B: "IC", Manufacturer=RFMD, Link=https://octopart.com/search?q=SPF+5043Z, Name=SPF-5043Z, Swap=No
U5A U5B U6A U6B: "IC RF SPDT Absorptive Switch", Manufacturer=Skyworks, Link=https://octopart.com/sky13286-359lf-skyworks+solutions-3998422, Misc="SPDT 0.1-6 GHz Hi Isol Absorptive Switch", Name=SKY13286-359LF, Swap=No, U/P/TKE=3-5V
X1: library part USB-microB_105017-1, "Connector microUSB-B", Manufacturer=MOLEX, Link=https://octopart.com/1050170001-molex-11866487?r=sp&s=Om3EEUYtRd-BHyhqotd9rA, Name=USB-microB
X2: library part "PCIe x4 Card", "PCIe x4 Card edge connector"
X3 X4 X11 X12 X13A X13B X14A X14B X15A X15B X16A X16B: library part U_FL, "Connector (UMCC)", Manufacturer=Molex, Link=https://octopart.com/0734120110-molex-16756629, Name=0734120110
  X3: Misc=1PPSin
  X4: Misc=1PPSout
  X11: Misc=MHZout
  X12: Misc=MHZin
  X13A X13B: Misc=TXin
  X14A X14B: Misc=LNAout
  X15A X15B: Misc=TRX
  X16A X16B: Misc=LNAin
X5: library part "PCIe MiniCard conn h1.55mm", "Connector PCIe MiniCard", Manufacturer="JAE Electronics", Link=https://octopart.com/mm60-52b1-g1-r850-jae+electronics-19499790, Name=MM60-52B1-G1
X6 X7: library part "PCIe MiniCard nut h1.55mm", "Stand-off nut PCIe MiniCard", Manufacturer="JAE Electronics", Link=https://octopart.com/nt1r3000-jae+electronics-19043816, Misc="PCIe MiniCard stand-off nut 1.55mm", Name=NT1R3000
X8: library part "Conn TSM-106-01-T-SH (=M20-89605)", "Connector header male", Manufacturer=Samtec, Link=https://octopart.com/tsm-106-01-t-sh-samtec-8444065?r=sp&s=4nKo29egTCGXCLlTpUf1dA, Name=TSM-106-01-T-SH
X9: "Connector SIM micro card", Manufacturer=JAE, Link=https://octopart.com/sf56s006v4br2000-jae+electronics-55772495?r=sp&s=RZW5_ItfTZ2wF5MtOkXdLQ
X10: library part "Conn Molex_788641001", "Connector board to board", Manufacturer=Molex, Link=https://octopart.com/78864-1001-molex-52668680?r=sp&s=CalIQCkHRmWKRIBINWJXJg, Misc="Connector board to board, 6 spring contacts", Name=78864-1001
X17: library part "Header 2X1 LOCK", "Headers & Wire Housings KK 100 Hdr FrLk Vert 02 Ckt Gold", Manufacturer=Molex, Manufacturer Part Number=22-11-2026, Supplier Part Number 1=WM19460-ND, ComponentLink1Description=https://datasheet.ciiva.com/5156/022045042-sd-206842-5156139.pdf?src-supplier=Mouser, ComponentLink1URL=https://datasheet.ciiva.com/5156/022045042-sd-206842-5156139.pdf?src-supplier=Mouser, ComponentLink2Description=https://datasheet.ciiva.com/30212/022232051-sd-30212109.pdf?src-supplier=Onlinecomponents.com, ComponentLink2URL=https://datasheet.ciiva.com/30212/022232051-sd-30212109.pdf?src-supplier=Onlinecomponents.com, Manufacturer 1=Molex, Manufacturer Part Number 1=22-11-2026, Part Description="Connector Header Through Hole 2 position 0.100\" (2.54mm)", RoHS=Yes, Stock 1=0, Supplier 1=Digi-Key
Z1A Z1B Z2A Z2B: library part "KNH16 Serie", "EMI Filter", Manufacturer="AVX / Kyocera", Link=https://octopart.com/knh16c105db5ts-avx-21214733, Misc="Power line EMI Filter 0603 Size", Name=KNH16C105DB5TS

## Via types
v1: diameter 0.8, hole 0.4, Top Layer to Bottom Layer, tented both sides, 470 vias
v2: diameter 0.8, hole 0.4, Top Layer to Bottom Layer, tented top, 20 vias
v3: diameter 0.4, hole 0.2, Top Layer to Bottom Layer, tented both sides, 8 vias

## Nets (pads, with @x,y where several pads share a name; then routed paths per layer and width w, separated by ;. In a path a pad name is that pad's centre, name@x,y a point inside that pad or via, vN(x,y) a via of type N, cw(c..) or ccw(c..) an arc to the next point about the centre after c; other vN are vias at no path point)
+3,3VPCI: J2.3 J2`.1 X2.A9 X2.A10 X2.B8 | length 47
  Top Layer w0.53: X2.B8@52.65,3.5 52.65,6.45 v1(52.7,6.5)
  Top Layer w1: v1(52.7,6.5) v1(53.6,6.5) v1(54.5,6.5)
  Top Layer w1.5: v1(27.4,14.5) v1(27.4,15.4) v1(27.4,16.3) 27.4,16.8
  Bottom Layer w0.7: X2.A9@53.65,3.5 v1@53.65,6.35 ; v1(54.5,6.5) 54.65,6.35 X2.A10@54.65,3.5
  Bottom Layer w1.5: v1(27.4,14.5) v1(27.4,15.4) 27.4,16.2 33.125,16.2 36.325,13 40.9,13 41.624,13.724 46.451,13.724 52.7,7.475 v1(52.7,6.5) v1(53.6,6.5) v1(54.5,6.5)
+5V: C12.2 J1.2 L3.1 | length 24.2
  Top Layer w0.75: J1.2@24.3,58.275 24.3,59.975 25.3,60.975 28.853,60.975 29.75,60.078 29.75,54.418 30.798,53.37 38.986,53.37 L3.1@39.675,52.681
+5V6: C7.2 C8.1 C9.2 L2.2 R5.2 U1.14 U2.1 | length 37.4
  Top Layer w0.3: U1.14@19.225,41 19.225,40.424 19.524,40.125 24.575,40.125 26.7,38 C8.1@26.85,37.85
  Top Layer w1: C9.2@10.75,44.8 10.75,45.7 U2.1@11.8,46.75 13.326,46.75 15.451,48.875 21.426,48.875 22.046,48.256 R5.2@22.046,47.225 25.192,47.225 26.142,46.275 C7.2@26.7,46.275
  Top Layer w1.5: C8.1@26.7,38 L2.2@26.7,42.85 C7.2@26.7,46.275
+5VBUS: J1.1 J2.1 L1.2 | length 80.5
  Top Layer w0.75: L1.2@18.8,61.875 20.968,59.708 20.968,57.068 21.76,57.86 J1.1@21.76,58.275
  Top Layer w2: v1(20.6,14.6) v1(20.6,15.7) v1(20.6,16.75)
  Bottom Layer w1: v1(20.6,14.6) v1(20.6,15.7) v1(20.6,16.75) 20.6,18.525 17.175,21.95 5.1,21.95 1.225,25.825 1.225,34.473 2.975,36.223 2.975,43.356 3.561,43.942 9.423,43.942 20.9,55.419 v1(20.9,57) v1(20.9,58) v1(20.9,59)
+5VRF: C11.2 C23A.1 C23B.1 C24A.1 C24B.1 L3.2 U5A.1 U5B.1 U6A.1 U6B.1 Z1A.1 Z1B.1 Z2A.1 Z2B.1 | length 132.6
  Top Layer w0.75: L3.2@43.275,51.65 43.275,52.525 44.013,53.263 44.913,53.263 45.625,53.975 49.355,53.975 50.68,52.65 C23B.1@50.95,52.65 v1(51.725,52.65) 51.95,52.875 53,52.875 ; 70.35,52.65 71.15,51.85 C24B.1@71.525,51.85 ; v1@70.825,52.175 v1(70.825,52.213) 70.847,52.213 70.911,52.149 v1@70.851,52.149 ; C24A.1@74.475,62.95 74.85,62.95 75.65,62.15 ; v1@75.149,62.651 75.089,62.651 75.153,62.587 v1(75.175,62.587) v1@75.175,62.625 ; 93,61.925 94.05,61.925 v1(94.275,62.15) C23A.1@95.05,62.15 C23A.1@95.32,62.15
  Top Layer w1: v1@48.825,61.6 v1(48.825,61.75) v1(48.825,63.1) ; v1(97.175,51.7) v1(97.175,53.05) v1@97.175,53.2
  Bottom Layer w0.75: v1(48.825,63.1) v1(48.825,61.75) 50.325,60.25 50.325,53.15 50.825,52.65 v1(51.725,52.65) 52.025,52.95 62.535,52.95 64.36,54.775 66.775,54.775 67.375,55.375 70.375,55.375 ; v1(70.825,52.213) 70.394,52.643 70.394,57 v1(69.613,57.781) 68.269,59.125 68.269,62.544 71.2,65.475 77.883,65.475 79.733,67.325 81.05,67.325 83.175,65.2 92.45,65.2 94.275,63.375 v1(94.275,62.15) v1@94.31,62.15 ; v1(75.175,62.587) 75.65,62.112 75.65,59.45 ; v1(76.387,57.019) 75.65,57.756 75.65,59.45 ; v1(97.175,51.7) v1(97.175,53.05) 95.525,54.7 95.525,60.935 v1@94.31,62.15 ; 75.65,59.45 78.625,59.45 79.25,60.075 81.613,60.075 83.563,62.025 90.75,62.025 91.037,61.738 93.898,61.738 v1@94.31,62.15
  other v1: 50.125,53.2
+12VIN: C1.1 C3.2 U1.10 U1.11 U1.12 U1.13 X2.A2 X2.A3 X2.B1 X2.B2 X2.B3 | length 91.9
  Top Layer w0.3: 17.62,42.012 U1.11@17.875,42.267 ; U1.13@18.725,41 18.15,41 17.875,41.275 U1.11@17.875,42.267 ; U1.11@17.875,42.267 18,42.392 U1.10@18,42.725 17.875,42.6 U1.11@17.875,42.267
  Top Layer w0.53: X2.B1@45.65,3.5 45.65,6 46.25,6.6 ; X2.B2@46.65,3.5 46.65,6.55 v1(46.7,6.6) ; v1(47.6,6.6) 47.65,6.55 X2.B3@47.65,3.5
  Top Layer w1.5: v1@12.225,42.012 v1(15.325,42.012) 17.62,42.012 ; 46.25,6.6 v1(46.7,6.6) v1(47.6,6.6)
  Mid-Layer 1 w1.5: v1(15.325,42.012) v1(12.025,42.012) 11.125,41.112 11.125,30.025 21.05,20.1 30.6,20.1 37.524,13.176 40.515,13.176 41.064,13.724 44.334,13.724 46.7,11.358 v1(46.7,6.6) v1(47.6,6.6)
  Bottom Layer w0.53: X2.A2@46.65,3.5 46.65,6.55 v1(46.7,6.6) v1(47.6,6.6) 47.65,6.55 X2.A3@47.65,3.5
+VCXTRX: J2.2 J2`.2 LED1.2 LED2.2 LED3.2 X5.2 X5.52 X17.2 | length 114.6
  Top Layer w0.53: LED1.2@0.925,38.625 0.937,38.638 0.937,39.887 LED2.2@0.95,39.9 0.931,39.919 0.931,41.081 LED3.2@0.912,41.1 1.787,41.975 v1(4.2,41.975)
  Top Layer w1.5: X17.2@13.335,17.737 17.25,17.737 19.113,19.6 22.604,19.6 v1(24.127,18.077) 24.612,18.562 32.188,18.562 34.85,15.9 43.629,15.9 44.879,14.65 46.625,14.65 48.35,16.375 53.313,16.375 58.608,21.669 58.608,34.507 52.515,40.6 49.1,40.6
  Bottom Layer w0.53: v1(4.2,41.975) 5.1,41.075 5.1,37.104 v1(24.127,18.077)
+VIOXTRX: X8.6 X10.4 | length 34.9
  Top Layer w0.75: X10.4@62.3,39.15 v1(63.05,39.15)
  Top Layer w1: v1(44.6,55.2) v1(44.6,59.5)
  Bottom Layer w0.32: v1(44.6,55.2) 44.6,50.714 45.224,50.09 54.45,50.09 55.39,49.15 56.754,49.15 60.25,45.654 60.25,41.95 v1(63.05,39.15)